# Altium PCB BSPDREVAF.PcbDoc
Units mil, origin at the board's own origin, x right, y up, seen from the top; angles counter-clockwise.
Board outline 1082.68 x 2165.35 mil, 4 copper layers (Top Layer 1, Top Layer, Bottom Layer, Bottom Layer 1), stack 23.756 mil thick; 77 components, 46 nets, 205 pads, 46 vias.
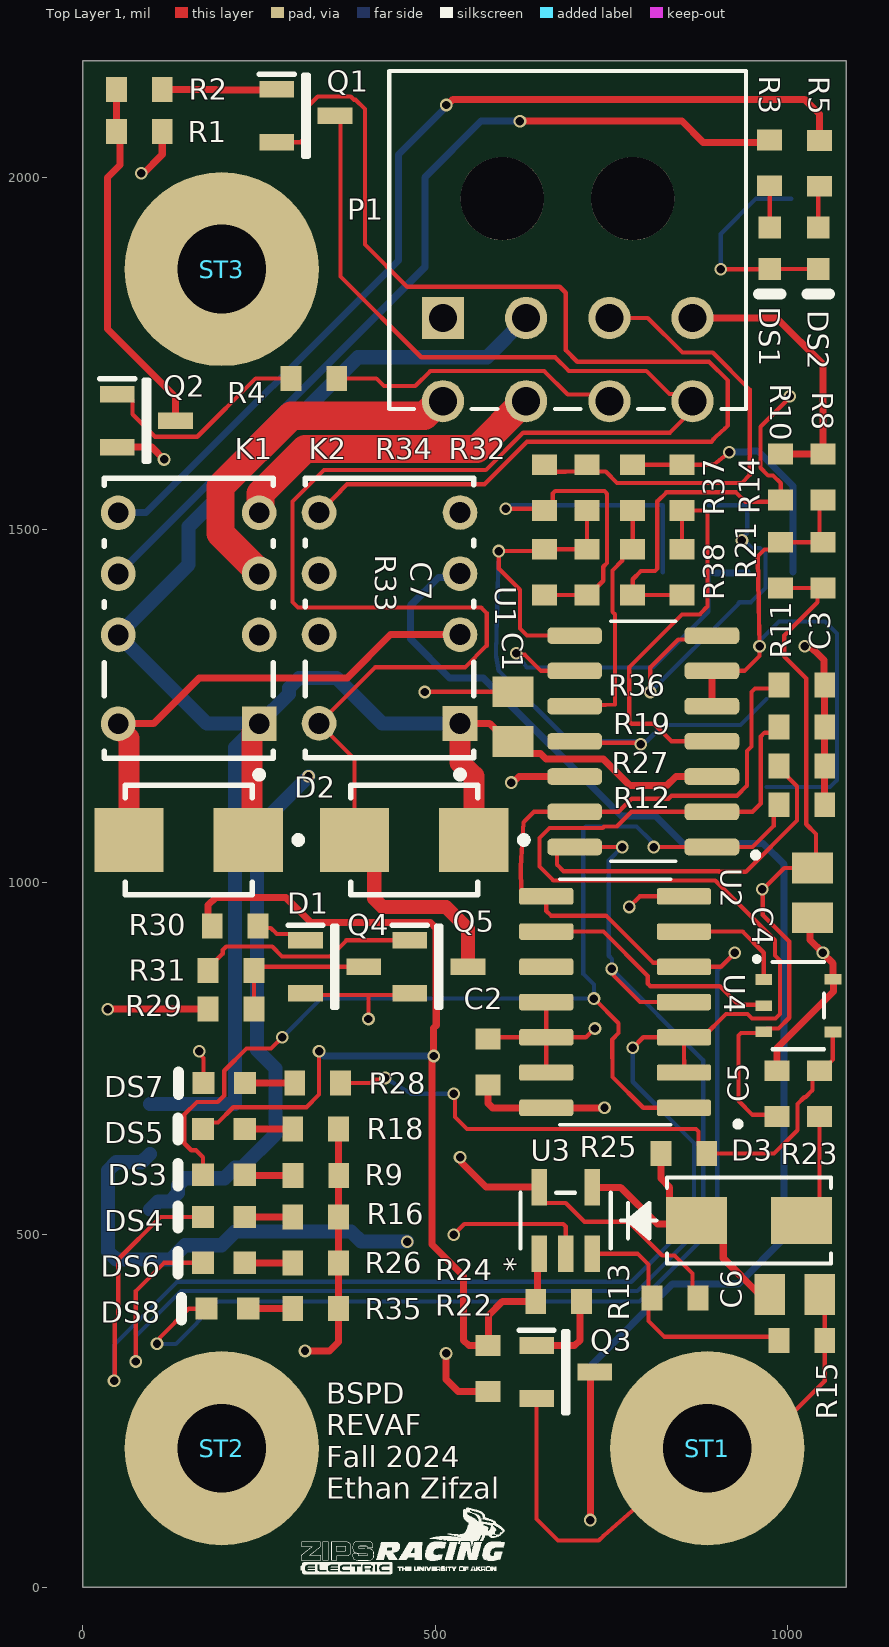
[diagram p0: Top Layer 1 view]
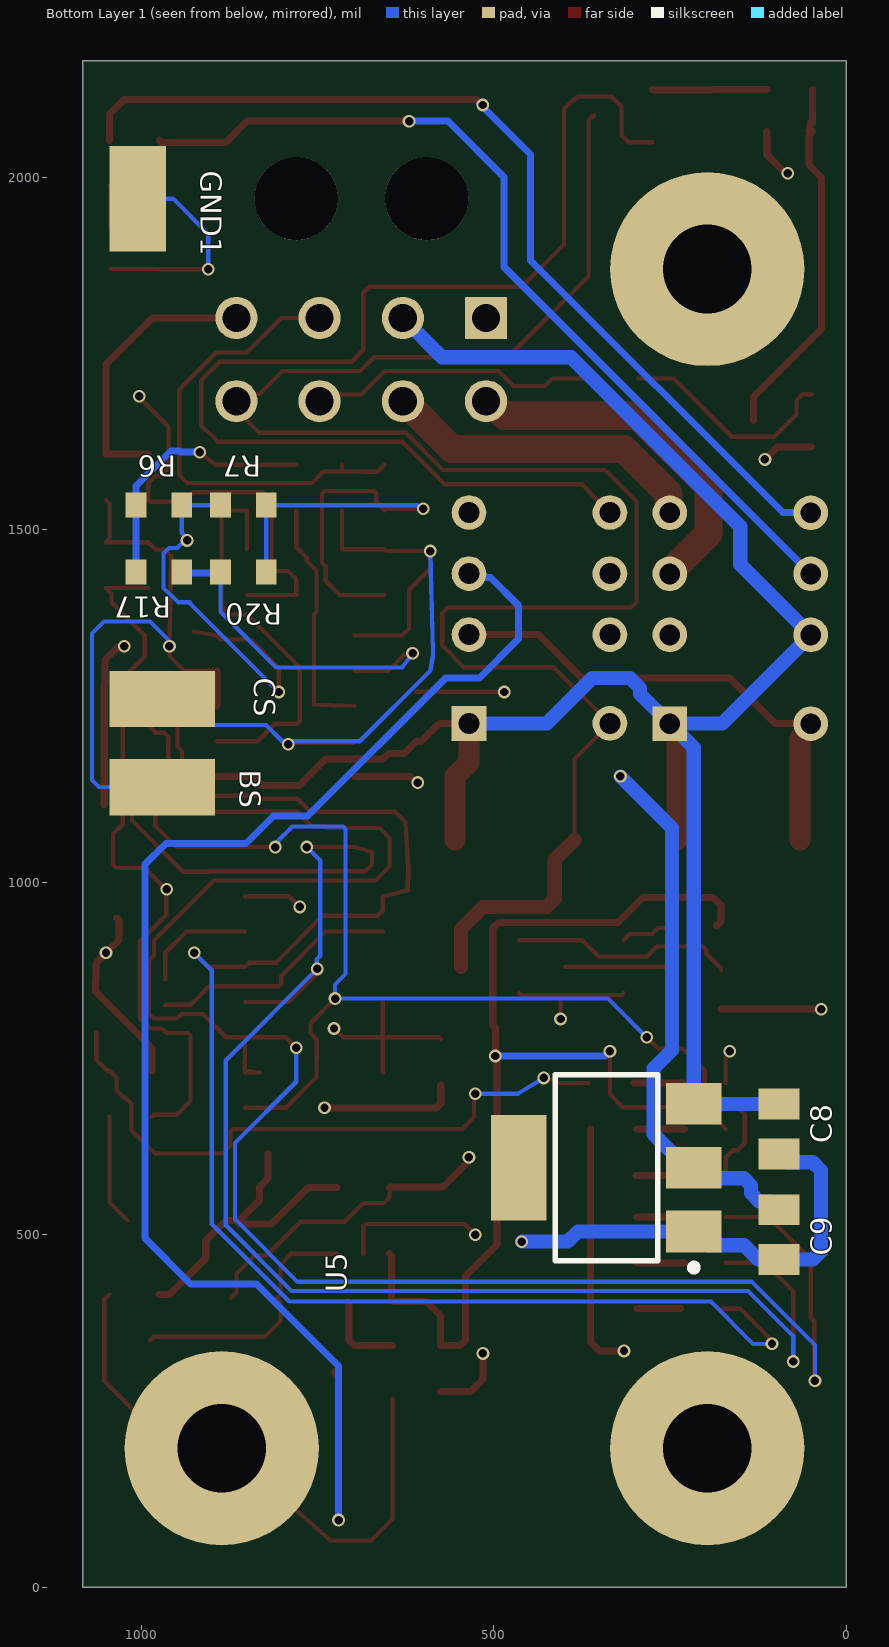
[diagram p1: Bottom Layer 1 view, seen from below]
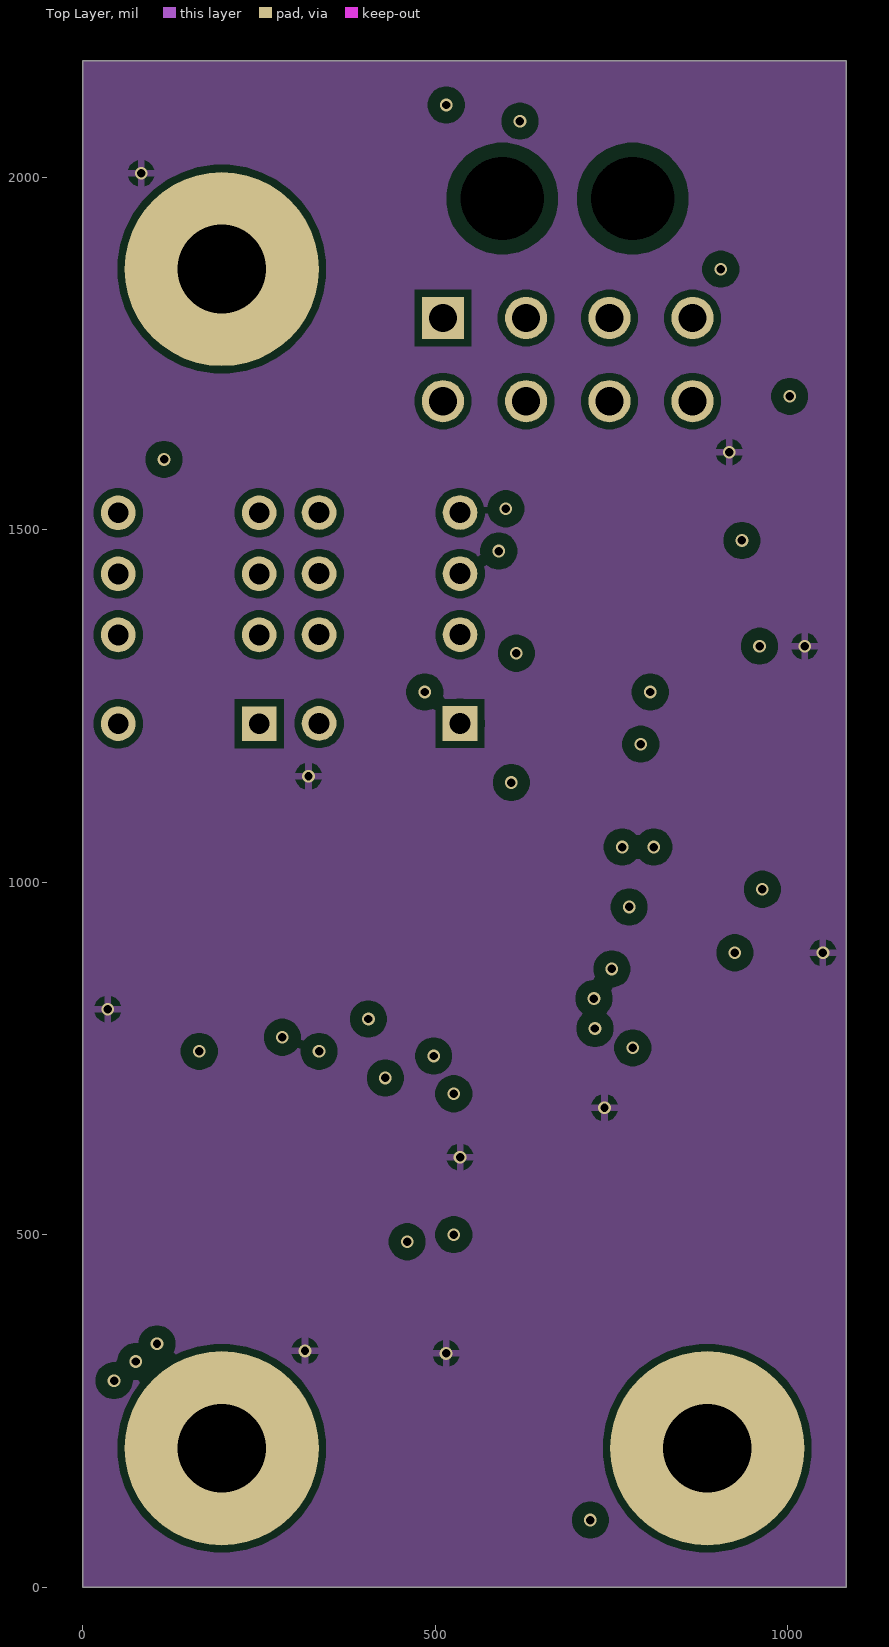
[diagram p2: Top Layer]
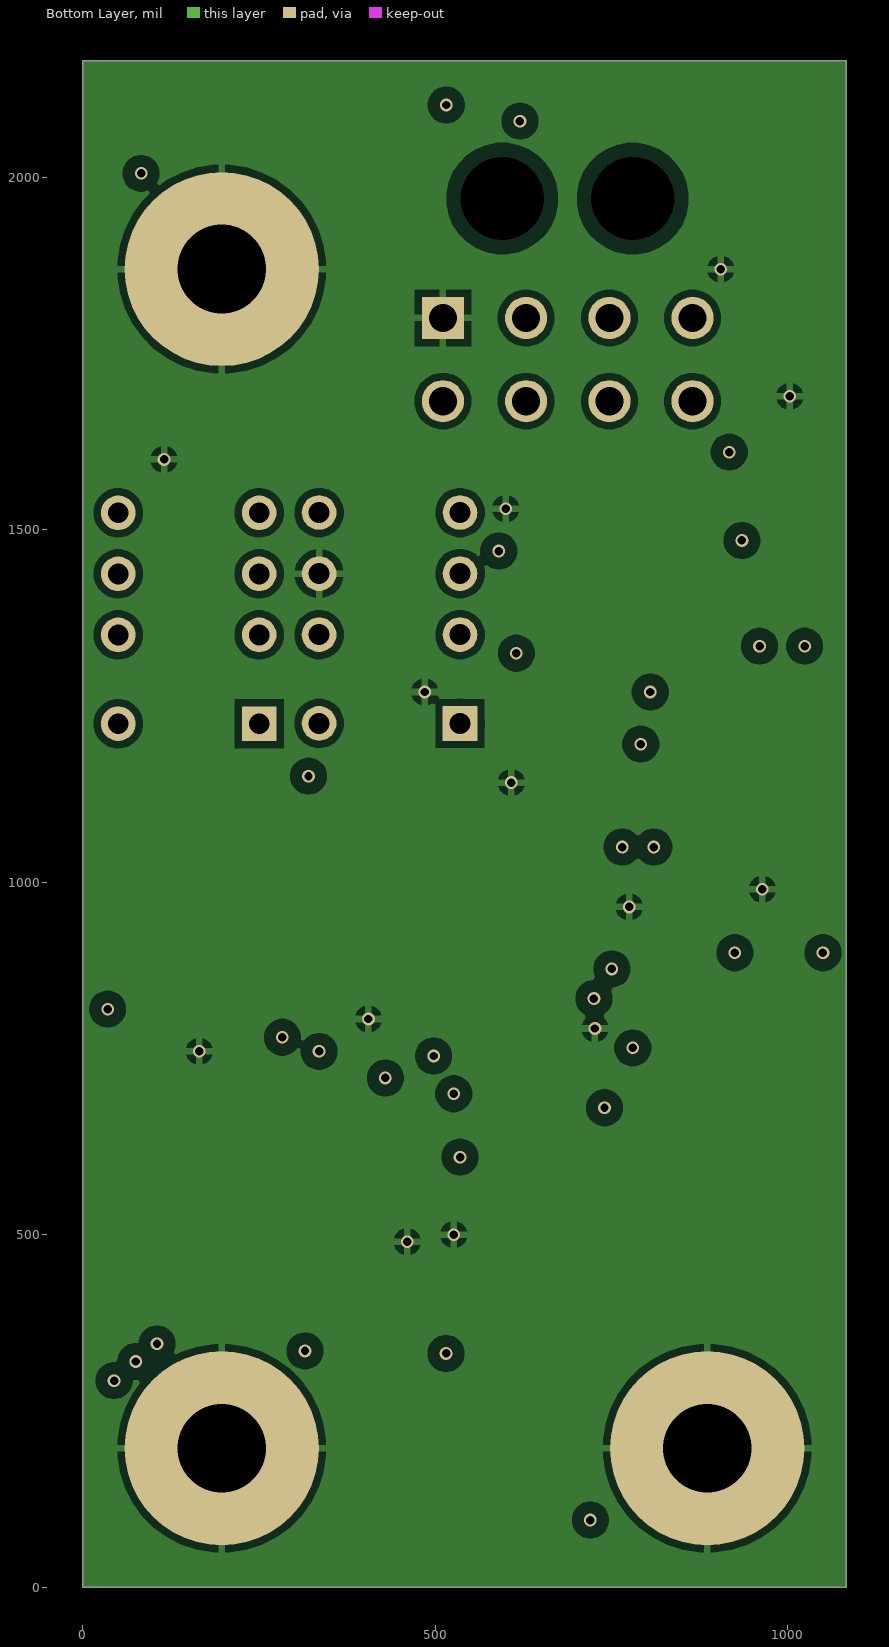
[diagram p3: Bottom Layer]
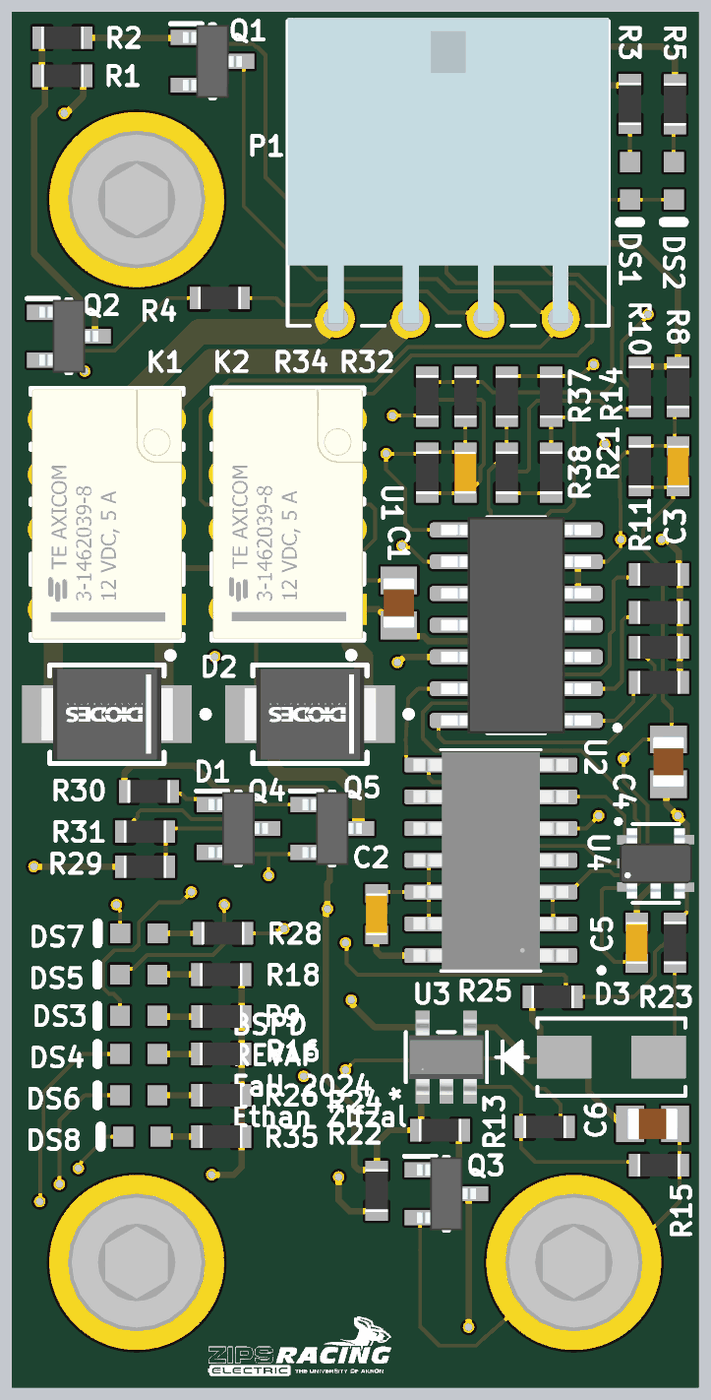
[diagram p4: 3D render of the assembled board from above, using the file's embedded part models]
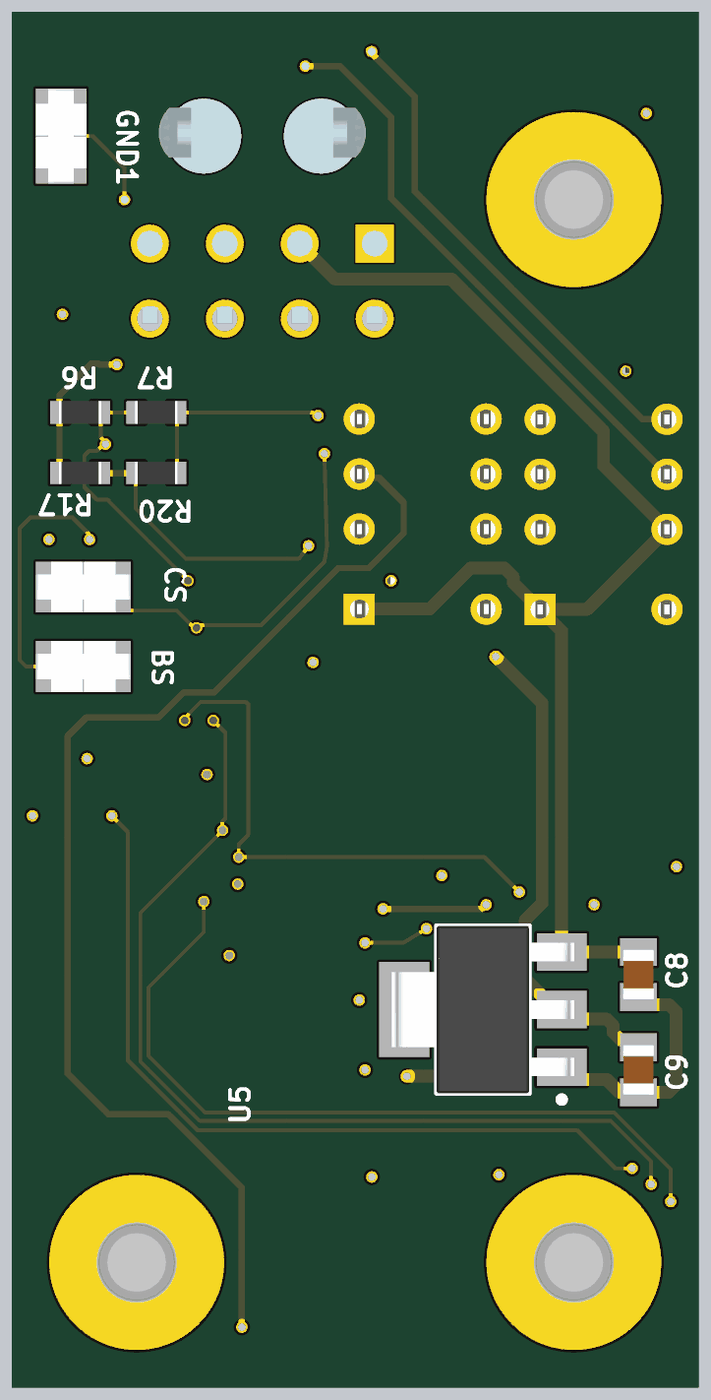
[diagram p5: 3D render of the assembled board from below, using the file's embedded part models]

## Layer stack, top to bottom
Top Solder: solder mask 0.4, Solder Resist, Dk 3.5
Top Layer 1: signal copper 1.378
Dielectric 2: prepreg 2.8, PP-006, Dk 4.1
Top Layer: signal copper 1.4
Dielectric 1: dielectric 12.6, FR-4, Dk 4.8
Bottom Layer: signal copper 1.4
Dielectric 3: prepreg 2.8, PP-006, Dk 4.1
Bottom Layer 1: signal copper 1.378
Bottom Solder: solder mask 0.4, Solder Resist, Dk 3.5

## Board outline
0,0 0,2165.35 1082.68,2165.35 1082.68,0

## Design rules (kind name [scope] priority, off if disabled: settings)
Clearance [All] p1: gap=10 ignorepadtopadclearanceinfootprint=FALSE except(0: Arc-Text Track-Text SMDPad-Text THPad-Text Via-Text Fill-Text Poly-Text Region-Text Text-Text; 5: SMDPad-SMDPad; 7: Arc-Arc Arc-Track Track-Track; 8: Arc-SMDPad Track-SMDPad; 20: Arc-Hole Track-Hole SMDPad-THPad SMDPad-Hole THPad-THPad THPad-Via THPad-Hole Via-Hole Fill-Hole Poly-Hole Region-Hole Text-Hole)
HoleSize [All] p1: absolutevalues=TRUE maxlimit=150 minlimit=1 maxpercent=80.000 minpercent=20.000
PolygonConnect PolygonConnect_1 [All] p1: connectstyle=Relief reliefconductorwidth=10 reliefentries=4 polygonreliefangle="90 Angle" airgapwidth=10
RoomDefinition BSPDSpring24 [InComponentClass('BSPDSpring24')] p1: confinementstyle=ConfineOut formatcopy=TRUE lockcomponents=FALSE outline -585,-835 1415,-835 1415,-350 -585,-350
RoutingVias [All] p1: holewidth=15 width=30 viastyle="Through Hole" minholewidth=12 minwidth=24 maxholewidth=28 maxwidth=50
SilkToSilkClearance [All] p1: silktosilkclearance=5.91
SilkToSolderMaskClearance [IsPad] p1: minsilkscreentomaskgap=5 clearancetoexposedcopper=TRUE
SolderMaskExpansion [All] p1: expansion=4 istentingtop=FALSE
Width [All] p1: maxlimit=100 minlimit=6 preferedwidth=6 toplayer_maxwidth=50 midlayer2_maxwidth=10 bottomlayer_maxwidth=50 minimp=50.000000 maximp=50.000000 favimp=50.000000
27 further rules are at their usual default settings.

## Components (designator, comment, footprint, x,y, rotation, side; value= is the part's Value field where it differs from the comment)
BS "5019" KSTN-5019_V 970,1135 r180 bottom locked
C1 "Capacitor 1uF 0805 25V" CAP-0805 610,1235 r270 top locked value=1µF
C2 "Capacitor 100nF 0603 5%" CAP-0603-Generic 575,745 r270 top locked value=100nF
C3 "Capacitor 220nF 0603 5%" CAP-0603-Generic 1050,1450 r90 top locked value=220nF
C4 "Capacitor 1uF 0805 25V" CAP-0805 1035,985 r270 top locked value=1µF
C5 "Capacitor 100nF 0603 5%" CAP-0603-Generic 985,700 r90 top locked value=100nF
C6 "Capacitor 1uF 0805 25V" CAP-0805 1010,415 r180 top locked value=1µF
C7 "Capacitor 220nF 0603 5%" CAP-0603-Generic 715,1440 r90 top locked value=220nF
C8 "Capacitor 1uF 0805 25V" CAP-0805 95,650 r90 bottom locked value=1µF
C9 "Capacitor 1uF 0805 25V" CAP-0805 95,500 r90 bottom locked value=1µF
CS "5019" KSTN-5019_V 970,1260 r180 bottom locked
D1 "B160B-13-F" FP-SMB-MFG 150,1060 r180 top locked
D2 "B160B-13-F" FP-SMB-MFG 470,1060 r180 top locked
D3 "S1MTR" SMA_SDS 945,520 r0 top locked
DS1 "LTST-C190KRKT" LTST-C191KRKT_V 974.41,1899.61 r270 top locked
DS2 "LTST-C190GKT" LTST-C190GKT_V 1043.31,1899.61 r270 top locked
DS3 "LTST-C190KRKT" LTST-C191KRKT_V 200,585 r180 top locked
DS4 "LTST-C190KRKT" LTST-C191KRKT_V 200,525 r180 top locked
DS5 "LTST-C190KRKT" LTST-C191KRKT_V 200,650 r180 top locked
DS6 "LTST-C190KRKT" LTST-C191KRKT_V 200,460 r180 top locked
DS7 "LTST-C190GKT" LTST-C190GKT_V 200.47,715 r180 top locked
DS8 "LTST-C190KRKT" LTST-C191KRKT_V 205,395 r180 top locked
GND1 "5019" KSTN-5019_V 1005,1970 r270 bottom locked
K1 "3-1462039-8" FP-3-1462039-8-MFG 150,1374.61 r90 top locked
K2 "3-1462039-8" FP-3-1462039-8-MFG 435,1375 r90 top locked
P1 "212528-0800" 212528-0800-Footprint-1 687.87,1826.3 r180 top locked
Q1 "BSS123" SOT96P237X111-3N 316.34,2087.6 r0 top locked
Q2 "BSS123" SOT96P237X111-3N 90,1655 r0 top locked
Q3 "BSS123" SOT96P237X111-3N 685,305 r0 top locked
Q4 "BSS123" SOT96P237X111-3N 357.05,880 r0 top locked
Q5 "BSS123" SOT96P237X111-3N 505,880 r0 top locked
R1 "Resistor 10k 0603 1%" RES-0603-Generic 80,2065 r0 top locked value=10k
R2 "Resistor 1k 0603 1%" RES-0603-Generic 80,2125 r0 top value=1k
R3 "Resistor 4k7 0603 1%" RES-0603-Generic 974.41,2020.67 r270 top locked value=4k7
R4 "Resistor 1k 0603 1%" RES-0603-Generic 327.52,1715 r180 top value=1k
R5 "Resistor 4k7 0603 1%" RES-0603-Generic 1045,2020 r90 top locked value=4k7
R6 "Resistor XX 0603 1%" RES-0603-Generic 975,1535 r0 bottom locked value=XX
R7 "Resistor XX 0603 1%" RES-0603-Generic 855,1535 r0 bottom locked value=XX
R8 "Resistor 1k 0603 1%" RES-0603-Generic 1050,1575 r270 top value=1k
R9 "Resistor 4k7 0603 1%" RES-0603-Generic 330.35,583.78 r0 top locked value=4k7
R10 "Resistor 1M 0603 1%" RES-0603-Generic 990,1575 r90 top locked value=1M
R11 "Resistor 1M 0603 1%" RES-0603-Generic 990,1450 r90 top locked value=1M
R12 "Resistor 10k 0603 1%" RES-0603-Generic 1020,1110 r0 top locked value=10k
R13 "Resistor 10k 0603 1%" RES-0603-Generic 840,410 r0 top locked value=10k
R14 "Resistor 62k 0603 1%" RES-0603-Generic 850,1560 r90 top locked value=62k
R15 "Resistor 10k 0603 1%" RES-0603-Generic 1020,350 r180 top locked value=18k7
R16 "Resistor 4k7 0603 1%" RES-0603-Generic 330,525 r0 top locked value=4k7
R17 "Resistor XX 0603 1%" RES-0603-Generic 975,1440 r0 bottom locked value=XX
R18 "Resistor 4k7 0603 1%" RES-0603-Generic 330,650 r0 top locked value=4k7
R19 "Resistor 10k 0603 1%" RES-0603-Generic 1020,1220 r0 top locked value=10k
R20 "Resistor XX 0603 1%" RES-0603-Generic 855,1440 r0 bottom locked value=XX
R21 "Resistor 4k7 0603 1%" RES-0603-Generic 850,1440 r90 top locked value=4k7
R22 "Resistor 10k 0603 1%" RES-0603-Generic 575,310 r270 top locked value=10k
R23 "Resistor 1k 0603 1%" RES-0603-Generic 1045,700 r270 top locked value=1k
R24 "Resistor 1k 0603 1%" RES-0603-Generic 675,405 r0 top locked value=1k
R25 "Resistor 470k 0603 1%" RES-0603-Generic 852.48,615 r180 top locked value=470k
R26 "Resistor 4k7 0603 1%" RES-0603-Generic 330,460 r0 top locked value=4k7
R27 "Resistor 10k 0603 1%" RES-0603-Generic 1020,1165 r0 top locked value=10k
R28 "Resistor 4k7 0603 1%" RES-0603-Generic 332.95,715 r0 top locked value=4k7
R29 "Resistor 10k 0603 1%" RES-0603-Generic 210,820 r180 top locked value=10k
R30 "Resistor 1k 0603 1%" RES-0603-Generic 215.98,938.27 r0 top locked value=1k
R31 "Resistor 1k 0603 1%" RES-0603-Generic 210,875 r180 top locked value=1k
R32 "Resistor 1k 0603 1%" RES-0603-Generic 715,1560 r270 top value=1k
R33 "Resistor 1M 0603 1%" RES-0603-Generic 655,1440 r90 top locked value=1M
R34 "Resistor 1M 0603 1%" RES-0603-Generic 655,1560 r90 top locked value=1M
R35 "Resistor 4k7 0603 1%" RES-0603-Generic 330,395 r0 top locked value=4k7
R36 "Resistor 10k 0603 1%" RES-0603-Generic 1020,1280 r0 top locked value=10k
R37 "Resistor 62k 0603 1%" RES-0603-Generic 780,1560 r90 top locked value=62k
R38 "Resistor 4k7 0603 1%" RES-0603-Generic 780,1440 r90 top locked value=4k7
ST1 "PTH-M3" PTH-M2D5X5 885.83,196.85 r0 top locked
ST2 "PTH-M3" PTH-M2D5X5 196.85,196.85 r0 top locked
ST3 "PTH-M3" PTH-M2D5X5 196.85,1870.08 r0 top locked
U1 "LM3302DR" SOIC127P600X175-14N 795,1200 r180 top locked
U2 "MC14073BDG" MC14073BDG-Footprint-1 755,830 r180 top locked
U3 "TS391IYLT" SOT23-5_STM 685,520 r90 top locked
U4 "BU4S71G2-TR" SSOP5_ROM-L 1015,825 r0 top locked
U5 "NCP1117ST50T3G" ONSC-SOT-223-4-318H-01_A_V 340,595 r0 bottom locked

## Footprints (in the part's own frame and the unit in brackets; to place one, negate y for a bottom-side part, rotate by r counter-clockwise, add the part's x,y. Pads: shape width x height; smd on the part's side, far side on the other; paste and mask are expansions set on the pad)
212528-0800-Footprint-1 [mm]
  round 3 / inner round 1.524 / far side round 3 hole 2.997 unplated paste-2539.97 mask+0.076: 0(-2.34,-3.65) 0(2.36,-3.65)
  rect 1.52x1.52 hole 1.016 paste-2539.97 mask+0.076: 1(4.5,0.65)
  round 1.52 hole 1.016 paste-2539.97 mask+0.076: 2(1.5,0.65) 3(-1.5,0.65) 4(-4.5,0.65) 5(4.5,3.65) 6(1.5,3.65) 7(-1.5,3.65) 8(-4.5,3.65)
  silkscreen extent -6.42,-8.25 6.43,3.93, body extent -6.43,-8.38 6.43,3.84, height 8.51
CAP-0603-Generic [mm] "Generic 0603 Capacitor footprint"
  rect 0.75x0.9 smd: 1(-0.825,0) 2(0.825,0)
  body extent -0.85,-0.44 0.85,0.44, height 0.6
CAP-0805 [mm] "0805 Capacitor footprint"
  rect 1.11x1.47 smd: 1(-0.9,0) 2(0.9,0)
  body extent -1,-0.63 1,0.63, height 1.45
FP-3-1462039-8-MFG [mm]
  rect 1.25x1.25 hole 0.75 paste-2539.97 mask+0: 1(-3.8,-2.54)
  round 1.25 hole 0.75 paste-2539.97 mask+0: 2(-0.6,-2.54) 3(1.6,-2.54) 4(3.8,-2.54) 5(3.8,2.54) 6(1.6,2.54) 7(-0.6,2.54) 8(-3.8,2.54)
  silkscreen extent -5.76,-3.04 5.04,3.04, body extent -5.14,-3.26 5.14,3.26, height 0.25
FP-SMB-MFG [mm]
  rect 2.5x2.3 smd paste+0 mask+0: 1(-2.15,0) 2(2.15,0)
  silkscreen extent -4.08,-1.97 2.28,1.97, body extent -3.5,-2.07 3.5,2.07, height 0.25
KSTN-5019_V [mm] "Test Point, 1-Leads, Body 3.81x2.03mm"
  rect 3.8x2.03 smd: 1(0,0)
  body extent -1.91,-1.02 1.9,1.02, height 2.29
LTST-C190GKT_V [mm] "SMD, 2-Leads, Body 1.6x0.8mm"
  rect 0.8x0.8 smd: 1(-0.75,0) 2(0.75,0)
  silkscreen extent 1.65,-0.4 1.65,0.4, body extent -0.8,-0.4 0.8,0.4, height 0.9
LTST-C191KRKT_V [mm] "SMD, 2-Leads, Body 1.6x0.8mm"
  rect 0.8x0.8 smd: 1(-0.75,0) 2(0.75,0)
  silkscreen extent 1.65,-0.4 1.65,0.4, body extent -0.8,-0.4 0.8,0.4, height 0.9
MC14073BDG-Footprint-1 [mm]
  rrect25% 1.95x0.59 smd: 1(-2.48,3.81) 2(-2.48,2.54) 3(-2.48,1.27) 4(-2.48,0) 5(-2.48,-1.27) 6(-2.48,-2.54) 7(-2.48,-3.81) 8(2.48,-3.81) 9(2.48,-2.54) 10(2.48,-1.27) 11(2.48,0) 12(2.48,1.27) 13(2.48,2.54) 14(2.48,3.81)
  silkscreen extent -4.53,-4.43 2,4.5, body extent -3.1,-4.33 3.1,4.33, height 1.76
ONSC-SOT-223-4-318H-01_A_V [mm] "SOT223, 4-Leads, Body 6.7x3.7mm, Pitch 2.3mm"
  rect 2x1.5 smd: 1(-3.15,2.3) 2(-3.15,0) 3(-3.15,-2.3)
  rect 2x3.8 smd: 4(3.15,0)
  silkscreen extent -3.27,-3.35 1.85,3.72, body extent -3.65,-3.35 3.65,3.35, height 1.8
PTH-M2D5X5 [mm]
  round 7 hole 3.2: 1(0,0)
  body extent -2.74,-2.75 2.74,2.75, height 3.12
RES-0603-Generic [mm] "Generic 0603 Resistor footprint with Solder Mask and Mechanical spacing layer"
  rect 0.75x0.9 smd: 1(-0.825,0) 2(0.825,0)
  body extent -0.85,-0.45 0.85,0.45, height 0.6
SMA_SDS [mil]
  rect 86x67 smd paste+0 mask+0: 1(-74.5,0) 2(74.5,0)
  silkscreen extent -182,-61 116,61, body extent 0,0 10,10, height 10
SOIC127P600X175-14N [mm]
  rrect50% 1.97x0.6 smd: 1(-2.475,3.81) 2(-2.475,2.54) 3(-2.475,1.27) 4(-2.475,0) 5(-2.475,-1.27) 6(-2.475,-2.54) 7(-2.475,-3.81) 8(2.475,-3.81) 9(2.475,-2.54) 10(2.475,-1.27) 11(2.475,0) 12(2.475,1.27) 13(2.475,2.54) 14(2.475,3.81)
  silkscreen extent -4.15,-4.33 1.17,4.33, body extent -3,-4.33 3,4.33, height 1.75
SOT23-5_STM [mil]
  rect 52x22 smd paste+0 mask+0: 1(-47,37.4) 2(-47,0) 3(-47,-37.4) 4(47,-37.4) 5(47,37.4)
  silkscreen extent -40,-64 40,64, body extent -59,-59 59,59, height 57
SOT96P237X111-3N [mm]
  rect 1.25x0.6 smd: 1(-1.05,0.955) 2(-1.05,-0.955) 3(1.05,0)
  silkscreen extent -1.68,-1.46 0.08,1.51, body extent -1.18,-1.46 1.18,1.46, height 1.11
SSOP5_ROM-L [mil]
  rect 24x15 smd paste+0 mask+0: 1(-49,37) 2(-49,0) 3(-49,-37) 4(49,-37.5) 5(49,37.5)
  silkscreen extent -61,-62 36,68, body extent -55,-57 55,57, height 49

## Part data
BS CS GND1: library part CMP-00012-1, "Interconnection Device"
C1 C4 C6 C8 C9: library part CMP-00045-1, "Capacitor, 0805", Voltage=25V
C2 C5: library part CMP-00030-2, "Capacitor, 0603, 5%", Max Operating Temperature=125°C, Min Operating Temperature=-55°C, Voltage=50V
C3 C7: library part CMP-00071-2, "Capacitor, 0603, 5%", Max Operating Temperature=125°C, Min Operating Temperature=-55°C, Voltage=50V
D1 D2: library part CMP-004-00032-1, "Rectifier Diode, Schottky, 1 Phase, 1 Element, 1A, 60V V(RRM), Silicon", Forward Voltage=700mV, Max Operating Temperature=150°C, Max Output current=1A, Min Operating Temperature=-65°C, Pins=2, Qualification Status="Not Qualified", RoHS Compliant=Yes, Surface Mount=Yes, Technology=SCHOTTKY
D3: library part CMP-004-00037-1, "Diode Standard 1000 V 1A Surface Mount SMA (DO-214AC)", Mfr_Name="SMC Diode Solutions", Copyright="Copyright (C) 2021 Ultra Librarian. All rights reserved.", Design Item ID=S1MTR, Digi-Key_Part_Number_1=1655-1506-1-ND, Digi-Key_Part_Number_2=1655-1506-2-ND, Digi-Key_Part_Number_3=1655-1506-6-ND, Digi-Key_Part_Number_4=S1MDITR-ND, Manufacturer_Part_Number=S1MTR, RefDes=RefDes, Source=Zips_Racing_Electric.SchLib, Type=DEV
DS1 DS3 DS4 DS5 DS6 DS8: library part CMP-007-00024-2, "LED Uni-Color Red, 62.5 mW, 25 mA, -30 to 85 degC, 2-Pin SMD, RoHS, Tape and Reel", Case/Package=0603, Colour=Red, Forward Current=20mA, Forward Voltage=2V, Manufacturer=Lite-On, Max Operating Temperature=85°C, Min Operating Temperature=-55°C, Package Description="2-Pin Surface Mount Device, Body 1.6 x 0.8 mm", Package Quantity=3000, Package Reference=C191KRKT, Power=75mW, Datasheet URL=http://optoelectronics.liteon.com/upload/download/DS-22-99-0151/S_110_LTST-C190KRKT.pdf, Datasheet Version="Rev. F, 05/2013", Illumination Colour=Red, Lens Style=Diffused, Luminous Intensity=54mcd, Manufacturer URL=http://www.us.liteon.com/, Mounting Technology=SM, Nominal Vf=2V, Packaging=TapeandReel, Pins=2, RoHS Compliant=True, Viewing Angle=130degrees
DS2 DS7: library part CMP-007-00022-2, "LED Uni-Color Green, 100 mW, 30 mA, -55 to 85 degC, 2-Pin SMD, RoHS, Tape and Reel", Case/Package=0603, Colour=Green, Forward Current=20mA, Forward Voltage=2.1V, Manufacturer=Lite-On, Max Operating Temperature=85°C, Min Operating Temperature=-55°C, Package Description="2-Pin Surface Mount Device, Body 1.6 x 0.8 mm", Package Quantity=3000, Package Reference=C190GKT, Power=100mW, Datasheet URL=http://datasheet.octopart.com/LTST-C190GKT-Lite-On-datasheet-158530.pdf, Datasheet Version=Dec-06, Illumination Colour=Green, Lens Style=Clear, Luminous Intensity=6mcd, Manufacturer URL=http://www.us.liteon.com/, Mounting Technology=SM, Nominal Vf=2.1V, Packaging=TapeandReel, Pins=2, RoHS Compliant=True, Viewing Angle=130degrees
K1 K2: library part CMP-008-00010-2, "Power/Signal Relay, 2 Form C, DPDT, Momentary, 0.01A (Coil), 12VDC (Coil), 140mW (Coil), 5A (Contact), 220VDC (Contact), DC Input, Random, AC/DC Output, Through Hole-Straight Mount", Current Rating=5A, Max Operating Temperature=85°C, Min Operating Temperature=-40°C, ComponentLink1Description=Datasheet, ComponentLink1URL=https://www.te.com/commerce/DocumentDelivery/DDEController?Action=srchrtrv&DocNm=108-98001&DocType=Data+Sheet&DocLang=English&DocFormat=pdf&PartCntxt=3-1462039-8, Contact Form=DPDT, Mounting Technology=Through-hole, Operate Time=3ms, Pins=8, RoHS Compliant=Yes
P1: library part CMP-002-00130-1, "Connector Power Header 8POS 3mm Solder Right Angle Through Hole Tray", Gender=Male, Pins=8
Q1 Q2 Q3 Q4 Q5: library part CMP-023-000002-1, "MOSFET N-CH 100V 170MA SOT23-3", Manufacturer_Name="ON Semiconductor", Mouser Part Number=512-BSS123, Arrow Part Number=BSS123, Arrow Price/Stock=https://www.arrow.com/en/products/bss123/on-semiconductor, Datasheet Link=http://uk.rs-online.com/web/p/products/6710321, Design Item ID=BSS123, Height=1.11mm, Manufacturer_Part_Number=BSS123, Mouser Price/Stock=https://www.mouser.co.uk/ProductDetail/ON-Semiconductor-Fairchild/BSS123?qs=FOlmdCx%252BAA2Kf8SEB3qLYA%3D%3D, Source=Zips_Racing_Electric.SchLib
R1 R12 R13 R15 R19 R22 R27 R29 R36: library part CMP-00020-12, "Resistor, 0603, 10k", Max Operating Temperature=155°C, Min Operating Temperature=-55°C, Power=100mW, Tolerance=1%, Datasheet=https://www.seielect.com/catalog/sei-rmcf_rmcp.pdf, Maximum Operating Temperature=155°C, Minimum Operating Temperature=-55°C
R2 R4 R8 R23 R24 R30 R31 R32: library part CMP-00021-7, "Resistor, 0603, 1k", Max Operating Temperature=155°C, Min Operating Temperature=-55°C, Power=100mW, Tolerance=1%, Datasheet=https://www.seielect.com/catalog/sei-rmcf_rmcp.pdf
R3 R5 R9 R16 R18 R21 R26 R28 R35 R38: library part CMP-00023-3, "Resistor, 0603, 1%, 1/10W", Max Operating Temperature=155°C, Min Operating Temperature=-55°C, Power=100mW, Tolerance=1%, Datasheet=https://www.seielect.com/catalog/sei-rmcf_rmcp.pdf
R6 R7 R17 R20: library part CMP-00039-1, "Resistor, 0603, XX", Max Operating Temperature=155°C, Min Operating Temperature=-55°C, Power=100mW, Tolerance=1%, Datasheet=https://www.seielect.com/catalog/sei-rmcf_rmcp.pdf
R10 R11 R33 R34: library part CMP-00041-2, "Resistor, 0603, 1%, 1/10W", Max Operating Temperature=155°C, Min Operating Temperature=-55°C, Power=100mW, Tolerance=1%, Datasheet=https://www.seielect.com/catalog/sei-rmcf_rmcp.pdf
R14 R37: library part CMP-00072-1, "Resistor, 0603, 62k", Max Operating Temperature=155°C, Min Operating Temperature=-55°C, Power=100mW, Tolerance=1%, Datasheet=https://www.seielect.com/catalog/sei-rmcf_rmcp.pdf
R25: library part CMP-00018-2, "Resistor, 0603, 1%, 1/10W", Max Operating Temperature=155°C, Min Operating Temperature=-55°C, Power=100mW, Tolerance=1%, Datasheet=https://www.seielect.com/catalog/sei-rmcf_rmcp.pdf
ST1 ST2 ST3: library part CMP-00028-00008-6, "M3 Plated Thru-Hole  (3.2mm), 7mm pad, 10 mm keep out zone", Pins=1
U1: library part CMP-033-000000-2, "Quad, General Purpose Differential Comparator", Package="SOIC-14 Texas Instruments", Availability="In Stock", Check_prices=https://www.snapeda.com/parts/LM3302DR/Texas+Instruments/view-part/?ref=eda, Component Type=Standard, Design Item ID=LM3302DR, MF="Texas Instruments", MP=LM3302DR, Pin Count=14, Price=None, Purchase-URL=https://pricing.snapeda.com/search/part/LM3302DR/?ref=eda, SnapEDA_Link=https://www.snapeda.com/parts/LM3302DR/Texas+Instruments/view-part/?ref=snap, Source=LM3302DR.SchLib
U2: library part CMP-016-00011-1, "MC14073BDG; Triple 3-Input AND Logic Gate; 3 - 18 V; 14-Pin SOIC", Case/Package=SOIC, High Level Output Current=-4.2mA, Low Level Output Current=4.2mA, Max Operating Temperature=125°C, Max Supply Voltage=18V, Min Operating Temperature=-55°C, Min Supply Voltage=3V, Height=1.5mm, Lead Free="Lead Free", Length=8.75mm, Logic Function="AND GATE", Mounting Technology="Surface Mount", Number of Circuits=3
U3: library part CMP-031-00010-1, "Comparator General Purpose CMOS, DTL, ECL, Open-Collector, TTL SOT-23-5", Mfr_Name=STMicroelectronics, Copyright="Copyright (C) 2021 Ultra Librarian. All rights reserved.", Design Item ID=TS391IYLT, Digi-Key_Part_Number_1=497-10245-1-ND, Digi-Key_Part_Number_2=497-10245-2-ND, Digi-Key_Part_Number_3=497-10245-6-ND, Manufacturer_Part_Number=TS391IYLT, RefDes=RefDes, Source=Zips_Racing_Electric.SchLib, Type=DEV
U4: library part CMP-031-00013-2, "IC GATE OR 1CH 2-INP 5SSOP", Case/Package=LSSOP, Max Operating Temperature=85°C, Max Supply Voltage=16V, Min Operating Temperature=-40°C, Min Supply Voltage=3V, Built_By=EMA_Molly, Copyright="Copyright (C) 2018 Accelerated Designs. All rights reserved", Design Item ID=BU4S71G2-TR, Manufacturer_Part_Number=BU4S71G2-TR, Pins=5, RefDes=RefDes, RoHS Compliant=Yes, Source=Zips_Racing_Electric.SchLib, SourceLibrary=ROHM_2019-10-21, Type=DEV, Vendor="ROHM Semiconductor"
U5: library part CMP-019-00031-3, "Low-Dropout Positive Fixed Voltage Regulator, 1 A, 5 V Vout, 0 to 125 degC, 4-Pin SOT-223, Pb-Free, Tape and Reel", Case/Package=TO-261-4, Current Rating=-600A, Dropout Voltage=1.2V, Manufacturer="ON Semiconductor", Max Input Voltage=20V, Max Operating Temperature=125°C, Max Ouput Current=1A, Min Input Voltage=3.5V, Min Operating Temperature=0°C, Nominal Output Voltage=5V, Package Description="4-Pin Small Outline Transistor, Body 6.5 x 3.5 mm, Pitch 2.3 mm", Package Quantity=4000, Package Reference=SOT-223-4-318H-01_A, Datasheet URL=https://datasheet.ciiva.com/28483/1748260-28483320.pdf, Datasheet Version="Rev. 26, 08/2013", Manufacturer URL=http://www.onsemi.com/, Mounting Technology=SM, Output Current=1A, Output Voltage=5V, Outputs=1, Packaging=TapeandReel, Pins=3, RoHS Compliant=True

## Via types
v1: diameter 18, hole 12, Top Layer 1 to Bottom Layer 1, 46 vias

## Nets (pads, with @x,y where several pads share a name; then routed paths per layer and width w, separated by ;. In a path a pad name is that pad's centre, name@x,y a point inside that pad or via, vN(x,y) a via of type N, cw(c..) or ccw(c..) an arc to the next point about the centre after c; other vN are vias at no path point)
5kW_REF: R17.1 R20.2 U1.9 | length 519.6
  Top Layer 1 w6: v1(615,1325) 617.3,1322.7 627.08,1322.7 649.78,1300 U1.9
  Bottom Layer 1 w6: v1(615,1325) 629.64,1304.93 808.57,1304.93 887.48,1383.84 R20.2
  Bottom Layer 1 w10: R20.2 897.24,1438.99 932.76,1438.99 R17.1
+5V: C2.2 C4.2 C5.2 C9.2 R1.2 R6.2 R9.2 R12.2 R13.2 R14.2 R16.2 R17.2 R18.2 R19.2 R22.2 R26.2 R27.2 R29.2 R35.2 R36.2 R37.2 U2.14 U3.5 U4.5 U5.2 | length 2977.7
  Top Layer 1 w6: U3.5 647.6,553 655.6,545 685,545 711.78,518.22 774.28,518.22 822,470.5 839.5,470.5 865,445 865,417.48 R13.2 ; R37.2 R14.2 895,1592.48 v1(917,1610.38)
  Top Layer 1 w10: v1(35,820) R29.2 ; v1@85,2005 112.48,2032.48 R1.2 R1.2@111.97,2065.51 ; v1(315,335) 350,335 362.48,347.48 R35.2 362.66,395.18 362.66,583.6 R9.2 362.66,583.96 362.66,649.82 R18.2 ; v1(515.2,331.4) 515.2,294.8 532.48,277.52 R22.2 ; v1(535,610) 536.53,608.47 536.53,603 572.05,567.48 647.12,567.48 U3.5 ; C2.2 575,685.86 580.86,680 v1(740,680) ; C5.2 985,765 1065,845 1065,861.5 U4.5 1064,885 1050,899 v1(1050,900) 1031.75,918.25 1031.75,946.31 C4.2 ; v1(1024,1335) 1025.53,1333.47 1033.37,1333.47 1044.17,1322.67 1051.24,1315.6 1051.24,1281.24 R36.2 R19.2 R12.2
  Bottom Layer 1 w10: v1(917,1610.38) 944.4,1610.38 946,1611.99 958.01,1611.99 1007.48,1562.52 R6.2 R17.2
  Bottom Layer 1 w20: C9.2 106.85,547.28 123.28,547.28 135,559 135,570 144.97,579.97 200.95,579.97 U5.2 225.83,595 273.35,642.53 273.35,735.73 246.86,762.23 246.86,1076.86 v1@320,1150
  other v1: 320.01,1150.54 82.49,2005.91
+12V: C1.2 C8.2 D1.1 D2.1 K1.1 K1.7 K2.1 P1.2 U1.3 U5.3 | length 2809.4
  Top Layer 1 w10: K2.1 577.09,1225.39 602.91,1199.57 C1.2 626.85,1182.72 649.33,1182.72 657.23,1174.81 738.26,1174.81 776.08,1137 828.23,1137 841.23,1150 U1.3
  Top Layer 1 w30: D1.1@239.65,1060 239.65,1214.65 K1.1 ; K2.1 535,1170 554.65,1150.35 D2.1
  Bottom Layer 1 w20: C8.2 95.06,685.49 215.93,685.49 U5.3 215.98,1190.98 K1.1 ; K2.1 424.61,1225.39 360,1290 306.46,1290 292.31,1275.86 292.31,1267.31 K1.1 ; P1.2 573.1,1745 390,1745 150,1505 150,1450.98 K1.7 175.98,1225 K1.1
AND_BS: U2.9 U4.2 | length 358.6
  Top Layer 1 w6: U2.9 738.51,930 801.36,867.16 801.36,856.13 804.87,852.61 903.45,852.61 930,826.06 964.94,826.06 U4.2
AND_CS: U2.6 U4.1 | length 163.8
  Top Layer 1 w6: U2.6 936.01,930 966,900.01 U4.1
BRAKE_PLAUS: D1.2 K1.8 K2.2 | length 708.7
  Top Layer 1 w10: K1.8 100,1225 165,1290 375,1290 436.38,1351.38 K2.2
  Top Layer 1 w30: K1.8 50,1219.8 65.35,1204.45 D1.2
BRAKE_PLAUS_L: K2.3 Q3.3 | length 2110.5
  Top Layer 1 w10: v1(720,95) 720,298.19 Q3.3
  Bottom Layer 1 w10: K2.3 529.5,1432.49 504.49,1432.49 465,1393 465,1345 520,1290 568,1290 764,1094 812.21,1094 851.21,1055 965,1055 995,1025 995,495 930,430 836.21,430 720,313.79 v1(720,95)
BS_FILT: BS.1 C3.2 R8.2 R11.2 U1.5 U1.6 | length 880.5
  Top Layer 1 w6: U1.6 938.64,1300 959.85,1321.21 959.85,1334.85 v1(960,1335) 959,1396.75 ccw(c930,1396.28) 958.99,1396.95 957.54,1459.99 957.54,1462.54 959.29,1464.29 967.14,1472.14 979.66,1472.14 R11.2 C3.2 1045,1487.48 1045,1537.52 R8.2
  Top Layer 1 w10: U1.5 U1.6
  Bottom Layer 1 w6: v1(960,1335) 961.53,1336.53 961.53,1343.9 987.63,1370 1052.84,1370 1070,1352.84 1070,1144.86 1060.14,1135 BS.1
BS_HARD: DS3.2 R12.1 U1.1 U2.1 | length 1597.9
  Top Layer 1 w6: DS3.2 170.47,609.75 160.5,619.72 153.7,619.72 143.72,629.7 143.72,670.3 161.67,688.25 191.25,688.25 200.47,697.48 200.47,732.53 231.98,764.03 266.89,764.03 v1(282.86,780) ; v1(725,835) 760,800 760,786.01 751,777.01 751,750.51 751.42,750.08 751.42,723.58 795,680 U2.1 ; v1(810,1050) U1.1 950,1050 980,1080 980,1102.48 R12.1
  Bottom Layer 1 w6: v1(282.86,780) 337.86,835 v1(725,835) 725,855 710,870 710,1075.49 713.51,1079 785.59,1079 805.57,1059.02 805.57,1057.68 810,1053.25 v1(810,1050)
BS_IN: P1.4 R8.1 R10.2 | length 399.7
  Top Layer 1 w10: P1.4 984.29,1800.71 1050,1735 R8.1 1040,1607.48 R10.2
BS_LOW: R14.1 R21.2 U1.4 | length 577.9
  Top Layer 1 w6: R21.2 850,1475.43 R14.1 882.6,1527.52 886.12,1524 886.12,1391.44 884.45,1389.7 878.51,1383.51 875,1380 872.51,1380 850,1380 775,1305 775,1228.51 778.51,1225 810,1225 835,1200 U1.4
BS_OPEN: DS4.2 R19.1 U1.2 U2.2 U2.3 | length 2854
  Top Layer 1 w6: v1@45,295 45,377.5 50,382.5 50,465 110,525 DS4.2 ; v1(780,765) 795,780 U2.3 ; U2.2 831.84,730 852.26,732.78 853.18,733.7 853.18,747.1 852.64,747.64 U2.3 ; R19.1 979.79,1212.27 967.27,1212.27 961.76,1206.76 961.76,1111.76 950,1100 U1.2 778.38,1100 757.38,1079 739.25,1079 737.44,1077.19 662.06,1077.19 647.78,1062.91 647.78,1022.22 667.39,1002.61 897.22,1002.61 982.06,917.78 982.06,896.02 989.13,888.95 989.13,813.07 982.56,806.5 949.44,806.5 942.88,813.06 912.47,813.06 879.41,780 U2.3
  Bottom Layer 1 w6: v1(44.1,292.79) 44.1,343.5 133.6,433 778.04,433 867,521.96 867,630 780,717 v1(780,765)
BS_REF: R6.1 R7.2 U1.7 | length 597.7
  Top Layer 1 w6: v1(805,1270) 805,1305 844.66,1344.66 887.1,1344.66 U1.7 U1.7@925.32,1355.91
  Bottom Layer 1 w6: v1(805,1270) 930,1395 930,1396.28 931.16,1397.44 948,1397.44 968.28,1417.73 968.28,1466.72 960.78,1474.22 949.03,1474.22 938.25,1485 v1(935,1485) 935,1488.25 942.52,1495.77 R6.1 R7.2
CS_FILT: C7.2 CS.1 R32.2 R33.2 U1.8 U1.11 | length 1101.4
  Top Layer 1 w6: U1.11 699.56,1198 789.43,1198 v1(791.43,1196) ; U1.8 630,1350 620,1360 620,1415 590,1445 v1(590,1470) 652.52,1470 R33.2 C7.2 R32.2
  Bottom Layer 1 w6: v1(590,1470) 586.01,1325.8 ccw(c615,1325) 586.46,1319.86 590,1300 591.76,1298.24 690,1200 v1@791.43,1200 ; v1(791.43,1196) v1@791.43,1200 ; CS.1 933.04,1223.04 823.04,1223.04 800,1200 v1@791.43,1200
CS_HIGH: DS6.2 R27.1 U1.14 U2.4 | length 2420.1
  Top Layer 1 w6: v1(75,320) 75,420 115,460 DS6.2 ; U1.14@696.36,1050 v1(765,1050) ; U1.14 672.56,1043.13 672.56,1025 681.94,1015.61 902.61,1015.61 903.22,1015 940.56,1015 1013.28,1087.73 1013.28,1136.28 987.52,1162.05 R27.1 ; v1(750.45,877.05) 752.75,874.75 752.75,867.52 790.27,830 U2.4
  Bottom Layer 1 w6: v1(75,320) 75,356.01 138.99,420 786.62,420 880,513.38 880,747.5 v1(750.45,877.05) 750.83,877.43 750.83,890.89 746,895.72 746,1031 v1(765,1050)
CS_IN: P1.3 R32.1 R34.2 | length 677.3
  Top Layer 1 w6: R34.2 665,1582.48 684.91,1582.48 685.14,1582.72 R32.1@713.52,1582.72 ; R32.1 715,1582.72 741.73,1582.72 757.73,1566.72 934.94,1566.72 946,1577.78 946,1699.21 893.61,1751.6 850.5,1751.6 801.39,1800.71 P1.3
CS_LOW: R37.1 R38.2 U1.10 | length 345.9
  Top Layer 1 w6: U1.10 730.43,1251.28 754.8,1252.23 754.8,1380.2 751.28,1383.72 751.28,1386.2 751.28,1442.34 765.28,1456.34 765.28,1460.72 780,1475.43 R37.1
CS_OPEN: DS8.2 R36.1 U1.13 U2.5 U2.8 | length 2334.6
  Top Layer 1 w6: v1(105,345) 105,348.25 109.23,352.48 109.23,354.23 150,395 DS8.2 ; v1(925,900) 905,880 U2.5 846.94,885.69 809.31,885.69 742.39,952.61 664.13,952.61 657.36,959.39 U2.8 621.98,988.61 621.01,1019.09 cw(c650,1020) 621.05,1021.75 624.88,1084.88 626.64,1086.64 640,1100 U1.13 760,1100 778.55,1118.55 830.98,1118.55 835.25,1122.81 927.94,1122.81 942.22,1137.09 942.22,1186.12 948.76,1192.66 948.76,1270.02 953.74,1275 982.52,1275 R36.1
  Bottom Layer 1 w6: v1(105,345) 131.74,345 191.74,405 790,405 900,515 900,875 v1(925,900)
FAULT_STAT: DS5.2 R22.1 R24.1 R30.1 U3.1 | length 1621.1
  Top Layer 1 w6: DS5.2 179.7,659.23 191.71,659.23 213.19,680.72 317.05,680.72 335,698.66 v1(335,760)
  Top Layer 1 w10: R30.1 177.52,944.25 177.52,967.52 188.5,978.5 287.8,978.5 323.3,943 493.06,943 501.27,934.79 501.27,797.11 497.51,793.35 v1(497.51,753.51) ; v1@495,753.51 495,486.16 540,441.16 540,350 547.52,342.48 575.24,342.48 575.24,385.24 595,405 R24.1 645.06,407.54 645.06,470.46 U3.1
  Bottom Layer 1 w10: v1(335,760) 341.68,753.32 495.66,753.32 v1(497.51,753.51)
GND: C1.1 C2.1 C3.1 C4.1 C5.1 C6.1 C7.1 C8.1 C9.1 DS1.2 DS2.2 DS7.2 GND1.1 K2.6 P1.1 Q2.2 Q3.2 Q4.2 Q5.2 R7.1 R10.1 R11.1 R15.1 R20.1 R21.1 R33.1 R34.1 R38.1 ST1.1 ST2.1 ST3.1 U1.12 U2.7 U2.11 U2.12 U2.13 U3.2 U4.3 U5.1 | length 5134.1
  Top Layer 1 w6: v1(165,760) 165,756.75 170.94,750.81 DS7.2 ; Q4.2 318.11,840 405,840 ; v1(405,806) 405,840 ; Q5.2 461.26,840 405,840 ; v1(485,1270) 485.43,1270.43 C1.1 ; v1(526,500) 541,515 681.49,515 685,511.49 U3.2 ; C2.1 577.52,780 U2.12 ; v1(600,1530) 652.52,1530 R34.1 666.49,1539 666.49,1551.49 670,1555 740,1555 743.72,1551.28 743.72,1453.16 738.28,1447.73 738.28,1427.85 717.95,1407.52 C7.1 R33.1 ; Q3.2 643.66,96.34 674,66 731.92,66 739.06,73.15 880.86,196.85 ST1.1 956.85,196.85 1052.48,292.48 R15.1 1052.48,407.95 C6.1 ; U2.13 U2.12 ; U2.11 U2.12 ; v1(726.48,792.5) 726.04,792.5 713.53,780 U2.12 ; v1(775,965) 790,980 U2.7 ; R21.1 R38.1 780,1430 791.58,1441.58 811.49,1441.58 815,1445.09 815,1540.56 827.73,1553.28 926.72,1553.28 940,1540 987.48,1540 R10.1 990,1566.28 979.06,1577.22 972.22,1577.22 961.28,1588.16 961.28,1646.28 v1@1000,1685 ; v1(905,1870) 974.33,1870 DS1.2 DS2.2 ; v1(964,990) 965,990 995.01,1020.01 ; v1@964.5,989.5 964.5,953.72 1002.13,916.09 1002.13,807.69 986.94,792.5 970.5,792.5 U4.3 964.03,786.03 933.51,786.03 930,782.52 930,690 950,670 982.52,670 C5.1 ; R11.1 C3.1 1042.27,1409.79 1042.27,1397.27 995,1350 995,1320.56 1026.28,1289.27 1026.28,1082.27 1040,1068.55 1040,1025.43 C4.1 C4.1@1021.03,1020.43 ; 995.43,1020.43 C4.1@1020.43,1020.43
  Top Layer 1 w10: Q2.2 97.6,1617.4 v1(115,1600) ; v1(607.8,1141.5) 609.96,1141.5 618.46,1150 U1.12
  Bottom Layer 1 w6: v1(600,1530) 603.25,1530 608.25,1535 R7.1 R20.1 ; v1(905,1870) 905,1920 955,1970 GND1.1
  Bottom Layer 1 w20: C8.1 83.15,602.72 47.15,602.72 35.43,591 35.43,476.28 47.15,464.57 C9.1 124.57,464.57 145,485 196.54,485 U5.1 380.45,504.45 394.9,490 v1(460,490)
  other v1: 1002.75,1689.41
NetD3_2: D3.2 R23.2 | length 158.1
  Top Layer 1 w6: D3.2 1045,545.5 R23.2
NetDS1_1: DS1.1 R3.2 | length 59.1
  Top Layer 1 w6: DS1.1 R3.2
NetDS2_1: DS2.1 R5.1 | length 59.1
  Top Layer 1 w6: DS2.1 1043.31,1985.83 R5.1
NetDS3_1: DS3.1 R9.1 | length 68.9
  Top Layer 1 w10: DS3.1 230.75,583.78 R9.1
NetDS4_1: DS4.1 R16.1 | length 68
  Top Layer 1 w10: DS4.1 R16.1
NetDS5_1: DS5.1 R18.1 | length 68
  Top Layer 1 w10: DS5.1 R18.1
NetDS6_1: DS6.1 R26.1 | length 68
  Top Layer 1 w10: DS6.1 R26.1
NetDS7_1: DS7.1 R28.1 | length 70.5
  Top Layer 1 w10: DS7.1 R28.1
NetDS8_1: DS8.1 R35.1 | length 63
  Top Layer 1 w10: DS8.1 R35.1
NetQ1_1: Q1.1 R2.2 | length 163.3
  Top Layer 1 w10: R2.2 189.03,2125 189.82,2124.21 274.02,2124.21 Q1.1
NetQ2_1: Q2.1 R4.2 | length 317.2
  Top Layer 1 w6: Q2.1 61.46,1692.6 70.27,1683.79 70.27,1664.1 102.18,1632.19 162.19,1632.19 245,1715 R4.2
NetQ2_3: Q2.3 R1.1 R2.1 | length 521.3
  Top Layer 1 w10: R1.1 52.52,2060 52.52,2017.52 35,2000 35,1785 131.34,1688.66 Q2.3 ; R2.1 47.52,2077.72 50.23,2077.72 R1.1@52.35,2065.86
NetQ3_1: Q3.1 R24.2 | length 120.4
  Top Layer 1 w10: Q3.1 697.6,342.6 705,350 705,402.52 R24.2
NetQ4_1: Q4.1 R30.2 | length 79.1
  Top Layer 1 w6: R30.2 247.48,937.28 247.48,935 266.49,935 275.08,926.41 306.9,926.41 Q4.1
NetQ5_1: Q5.1 R31.2 | length 320
  Top Layer 1 w6: R31.2 177.52,877.95 198.27,898.7 198.27,903.7 203.28,908.72 268.59,908.72 282.52,894.79 350.88,894.79 373.69,917.6 Q5.1
NetR13_1: R13.1 R15.2 U3.3 | length 367.1
  Top Layer 1 w6: U3.3 787,473 802.52,457.48 802.52,415 R13.1 802.52,405 802.52,377.48 825,355 982.52,355 R15.2
OR: R23.1 R25.1 R28.2 U4.4 | length 899
  Top Layer 1 w6: R28.2 408.1,715 413.13,720.03 426.8,720.03 v1(429.1,722.32) ; v1(526,700) 528,698 528,667 545,650 869.68,650 873.2,646.49 873.2,626.76 R25.1 980.52,615 1013.72,648.2 1013.72,685.2 1023.51,695 1025,695 1035,705 1035,722.48 R23.1 1047.95,732.48 1064,748.53 U4.4
  Bottom Layer 1 w6: v1(429.1,722.32) 465.58,700 v1(526,700)
OR_DELAYED: C6.2 D3.1 R25.2 U3.4 | length 443.8
  Top Layer 1 w10: U3.4 763,567 815,515 D3.1@861,515 ; R25.2 820,579.5 832.5,567 832.5,548.5 861,520 880,520 908.5,491.5 908.5,466.5 960,415 C6.2
POR_GATE: Q4.3 R29.1 R31.1 | length 213
  Top Layer 1 w6: R29.1 R31.1 247.48,880 Q4.3
POR_Latch: D2.2 K2.8 P1.8 Q1.3 Q5.3 | length 2678.9
  Top Layer 1 w6: Q1.3 358.66,2087.6 365.47,2080.79 365.47,1859.53 480,1745 670,1745 689.4,1725.6 799.4,1725.6 832.2,1692.8 854.83,1692.8 P1.8 865.03,1670.03 833,1638 624.64,1638 571.64,1585 341.99,1585 297.24,1540.25 297.24,1397.76 305,1390 565,1390 572.76,1382.24 572.76,1335.74 542.03,1305 414.61,1305 K2.8 385.35,1175.04 D2.2
  Top Layer 1 w20: D2.2 413.28,1032.07 413.28,976.72 425,965 515,965 546.34,933.66 Q5.3
POR_Latch_RST: K2.5 Q1.2 | length 1713.2
  Top Layer 1 w6: Q1.2 308.61,2050 318.56,2059.95 318.56,2100.46 333.11,2115 380,2115 384.59,2110.41 386.84,2110.41 400,2097.25 400,1905 460,1845 676.49,1845 685,1836.49 685,1755 701.4,1738.6 888.23,1738.6 915,1711.83 915,1648.05 911.49,1644.53 897.52,1631.86 ccw(c917,1610.38) 891.95,1625 630.02,1625 569.78,1564.75 374.75,1564.75 365,1555 365,1554.61 K2.5
Reset: P1.7 R4.1 | length 418.1
  Top Layer 1 w6: R4.1 416.24,1715 427.03,1704.21 471.51,1704.21 492.89,1725.6 654.4,1725.6 687.87,1692.13 737.39,1692.13 P1.7
SD_CLOSED: K1.5 R5.2 | length 1377.7
  Top Layer 1 w10: v1(515.35,2102.88) 517.09,2102.88 525.21,2111 1024,2111 1045,2090 R5.2
  Bottom Layer 1 w10: K1.5 50.39,1524.61 89.61,1524.61 447.5,1882.5 447.5,2032.5 v1@520,2105
SD_OPEN: K1.6 R3.1 | length 1278.9
  Top Layer 1 w10: v1(620,2080) 850,2080 880,2050 971.26,2050 R3.1
  Bottom Layer 1 w10: K1.6 485,1872.6 485,2000 565,2080 v1(620,2080)
Shutdown_In: K1.3 P1.5 | length 512.3
  Top Layer 1 w40: K1.3 250,1440.09 195.24,1494.86 195.24,1561.7 295.53,1662 484.74,1662 505.33,1682.6 P1.5
Shutdown_Out: K1.4 P1.6 | length 459.5
  Top Layer 1 w40: K1.4 251.76,1525.98 251.76,1551.76 315,1615 559.21,1615 626.81,1682.6 P1.6
pads on no net: K1.2 K2.4 K2.7 P1.0 U2.10 U5.4

## Polygon pours and split planes (outlines as drawn)
GND on Bottom Layer "NONET_L-01_P-001" (solid, pour order 0): 0,2165.35 1082.68,2165.35 1082.68,0 0,0
+5V on Top Layer "NONET_L-01_P-001" (solid, pour order 1): 0,0 1082.68,0 1082.68,2165.35 0,2165.35

## Silkscreen, mask and mechanical layers (free items; w line width, h text height)
Top Overlay:
  drawing of 34 lines, arcs and shapes, not listed
  text "BSPD / REVAF / Fall 2024 / Ethan Zifzal" at 345,125 h30
Mechanical 1:
  circle w10: c196.85,196.85 r138.3
  circle w10: c885.83,196.85 r138.3
  circle w10: c196.85,1870.08 r138.3
  lines w10: 196.85,1870.08 196.85,196.85 885.83,196.85 ; 0,0 0,2165.35 1082.68,2165.35 1082.68,0 0,0

## Text inside footprints (layer, text, board x,y; h text height)
D3: Mechanical 7 "0.06in/1.524mm" at 776,369 h30; Mechanical 7 "0.223in/5.664mm" at 851.25,269 h30; Mechanical 7 "0.112in/2.845mm" at 1242.5,507.5 h30; Mechanical 7 "0.067in/1.702mm" at 1142.5,507.5 h30; Mechanical 7 "Alt 2 Padstyle: OX90Y60D30P" at 607.5,39 h30; Mechanical 7 "Alt 1 Padstyle: OX60Y90D30P" at 607.5,114 h30; Mechanical 7 "Default Padstyle: RX86Y67D0T" at 595,189 h30
U3: Top Overlay "*" at 627.6,447 h30 r90; Mechanical 7 "Default Padstyle: RX52Y22D0T" at 944,170 h30 r90; Mechanical 7 "Alt 1 Padstyle: OX60Y90D30P" at 1064,182.5 h30 r90; Mechanical 7 "Alt 2 Padstyle: OX90Y60D30P" at 1124,182.5 h30 r90; Mechanical 7 "0.069in/1.753mm" at 531,426.25 h30 r90; Mechanical 7 "0.118in/2.997mm" at 456,426.25 h30 r90; Mechanical 7 "0.118in/2.997mm" at 697.5,674.5 h30 r90; Mechanical 7 "0.037in/0.95mm" at 678.8,178 h30 r90; Mechanical 7 "0.024in/0.61mm" at 864,385.5 h30 r90; Mechanical 13 "*" at 666.6,483 h30 r90
U4: Mechanical 7 "Pin One Padstyle: RX24Y15D0T" at 665,508 h30; Mechanical 7 "Default Padstyle: RX24Y15D0T" at 665,568 h30; Mechanical 7 "Alt 1 Padstyle: OX60Y90D30P" at 677.5,328 h30; Mechanical 7 "Alt 2 Padstyle: OX90Y60D30P" at 677.5,268 h30; Mechanical 7 "0.063in/1.6mm" at 933.75,977 h30; Mechanical 7 "0.11in/2.794mm" at 927.5,1052 h30; Mechanical 7 "0.114in/2.896mm" at 1366.5,812.5 h30; Mechanical 7 "0.037in/0.94mm" at 671,831 h30; Mechanical 7 "0.075in/1.905mm" at 1184,812.5 h30; Mechanical 7 "0.008in/0.203mm" at 870.25,648 h30; Mechanical 13 "*" at 981,829 h30